# Altium PCB PCB2.PcbDoc
Units mil, origin at the board's own origin, x right, y up, seen from the top; angles counter-clockwise.
Board outline 3316.26 x 1160 mil, 2 copper layers (Top Layer, Bottom Layer); 49 components, 41 nets, 161 pads, 17 vias.
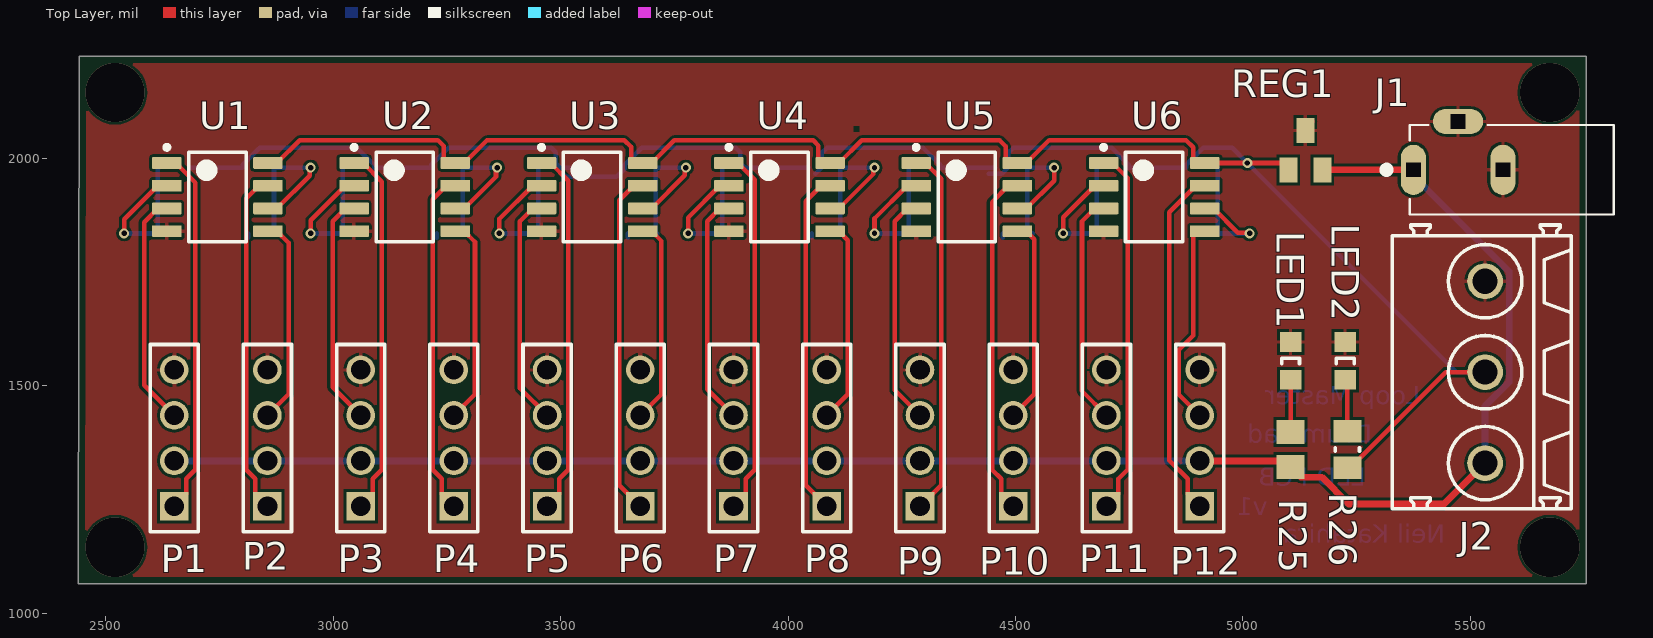
[diagram p0: Top Layer view]
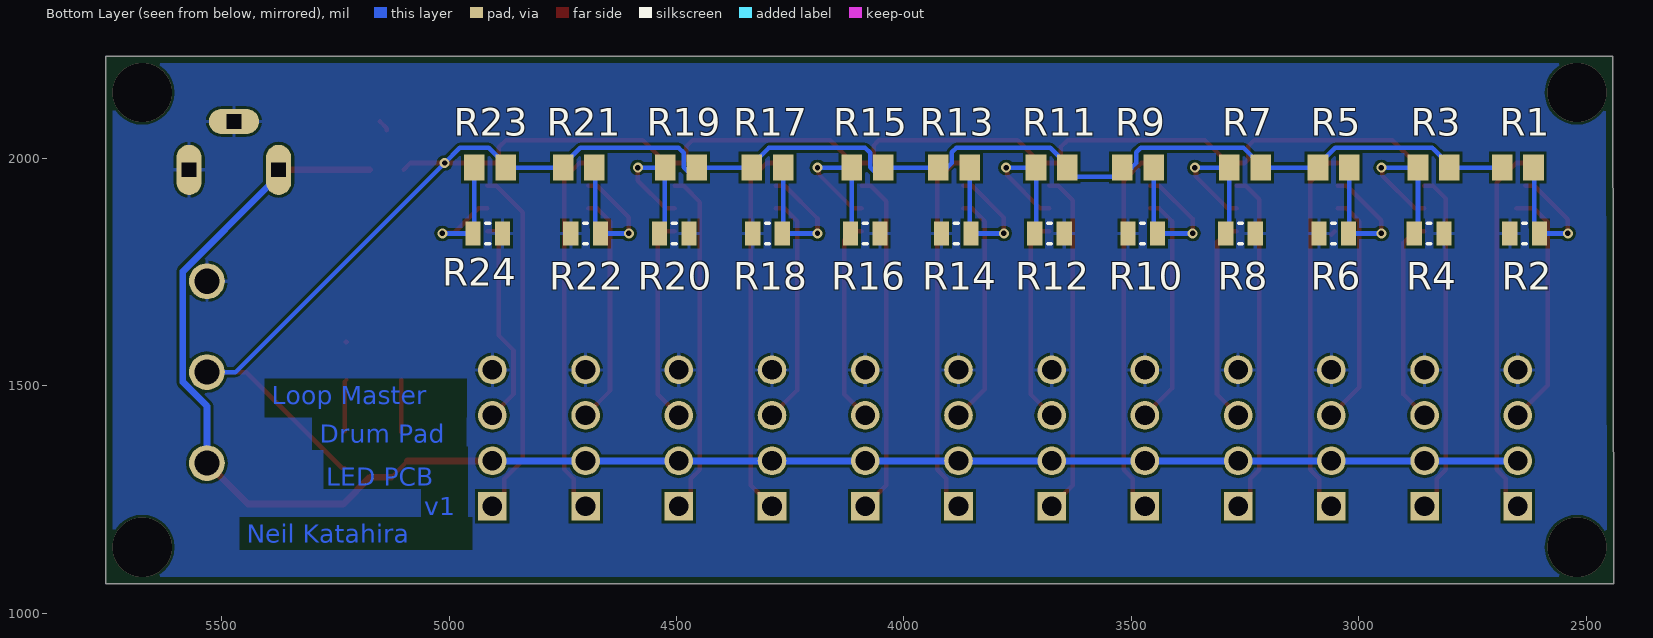
[diagram p1: Bottom Layer view, seen from below]
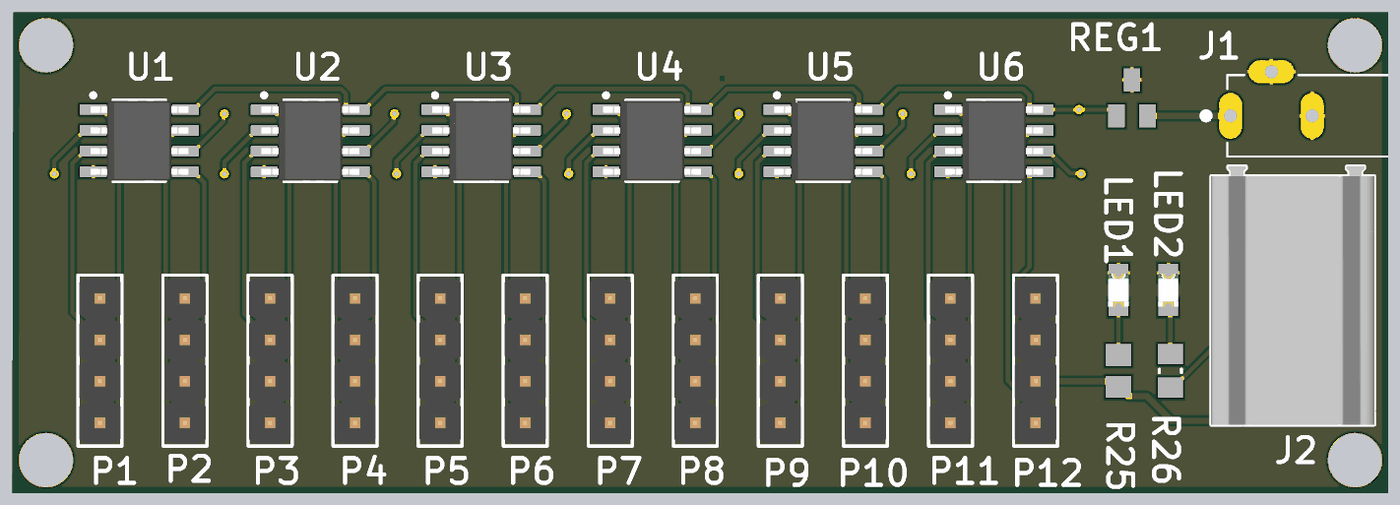
[diagram p2: 3D render of the assembled board from above, using the file's embedded part models]

## Layer stack, top to bottom
Top Solder: solder mask 0.4, Solder Resist, Dk 3.5
Top Layer: signal copper 1.4
Dielectric 1: dielectric 12.6, FR-4, Dk 4.8
Bottom Layer: signal copper 1.4
Bottom Solder: solder mask 0.4, Solder Resist, Dk 3.5

## Board outline
2438.74,1065 5755,1065 5755,2225 2441.24,2225

## Design rules (kind name [scope] priority, off if disabled: settings)
BoardOutlineClearance [All] p1: gap=15 ignorepadtopadclearanceinfootprint=FALSE
Clearance [All] p1: gap=6 ignorepadtopadclearanceinfootprint=FALSE except(0: Arc-Hole Track-Hole SMDPad-Hole THPad-Hole Via-Hole Fill-Hole Poly-Hole Region-Hole Text-Hole)
ComponentClearance [All] p1: gap=1 collisioncheckmode=3 verticalgap=1 showdistances=FALSE
DiffPairsRouting [All] p1: maxlimit=393.7 minlimit=6 mostfreqgap=8 toplayer_minwidth=6 toplayer_maxwidth=15 toplayer_prefwidth=8 bottomlayer_minwidth=6 bottomlayer_maxwidth=15 bottomlayer_prefwidth=8 maxuncoupledlength=500
HoleSize [All] p1: absolutevalues=TRUE maxlimit=265 minlimit=13 maxpercent=80.000 minpercent=20.000
HoleToHoleClearance [All] p1: gap=10 allowstackedmicrovias=FALSE
MinimumAnnularRing [All] p1: minimumring=7
MinimumSolderMaskSliver [All] p1: minsoldermaskwidth=0
PlaneClearance [All] p1: clearance=10
PlaneConnect [All] p1: planeconnectstyle=Direct reliefexpansion=16 reliefentries=4 reliefconductorwidth=6 reliefairgap=6
PolygonConnect [All] p1: connectstyle=Relief reliefconductorwidth=8 reliefentries=4 polygonreliefangle="90 Angle" airgapwidth=6
RoomDefinition Sheet3 [InComponentClass('Sheet3')] p1: confinementstyle=ConfineIn formatcopy=TRUE lockcomponents=FALSE outline 0,0 2000,0 2000,1000 0,1000
RoomDefinition Sheet1 [InComponentClass('Sheet1')] p2: confinementstyle=ConfineIn formatcopy=TRUE lockcomponents=FALSE outline 0,0 2000,0 2000,1000 0,1000
RoutingCorners [All] p1: cornerstyle=45-Degree minsetback=49.21 maxsetback=49.21
RoutingVias [All] p1: holewidth=15 width=30 viastyle="Through Hole" minholewidth=13 minwidth=27 maxholewidth=100 maxwidth=114
SilkToSilkClearance [All] p1: silktosilkclearance=0
SilkToSolderMaskClearance [IsPad] p1: minsilkscreentomaskgap=6 clearancetoexposedcopper=TRUE
SolderMaskExpansion [All] p1: expansion=2.95
Width [All] p1: maxlimit=400 minlimit=6 preferedwidth=8
20 further rules are at their usual default settings.

## Classes and differential pairs
component class Sheet3: R1 R2 R3 R4 R5 R6 R7 R8 R9 R10 R11 R12 R13 R14 R15 R16 R17 R18 R19 R20 R21 R22 R23 R24 U1 U2 U3 U4 U5 U6
component class Sheet1: J2 LED2 R25 R26

## Components (designator, comment, footprint, x,y, rotation, side; value= is the part's Value field where it differs from the comment)
J1 "PJ-007" CUI_PJ-007 5375,1975 r0 top
J2 "1716090000" LM_5_08_90_03 5525,1530 r90 top
LED1 "150080VS75000" 0805_A 5105,1555 r270 top
LED2 "150080RS75000" 0805_A 5225,1555 r270 top
P1 "61300411121" 61300411121 2650,1385 r90 top
P2 "61300411121" 61300411121 2855,1385 r90 top
P3 "61300411121" 61300411121 3060,1385 r90 top
P4 "61300411121" 61300411121 3265,1385 r90 top
P5 "61300411121" 61300411121 3470,1385 r90 top
P6 "61300411121" 61300411121 3675,1385 r90 top
P7 "61300411121" 61300411121 3880,1385 r90 top
P8 "61300411121" 61300411121 4085,1385 r90 top
P9 "61300411121" 61300411121 4290,1385 r90 top
P10 "61300411121" 61300411121 4495,1385 r90 top
P11 "61300411121" 61300411121 4700,1385 r90 top
P12 "61300411121" 61300411121 4905,1385 r90 top
R1 "ERJ-6GEYJ152V" RESC2013X70X40NL20T20 2650,1980 r0 bottom
R2 "CRCW08054K70JNEA" RESC2013X50X30LL20T20 2635,1835 r180 bottom
R3 "ERJ-6GEYJ152V" RESC2013X70X40NL20T20 2835,1980 r180 bottom
R4 "CRCW08054K70JNEA" RESC2013X50X30LL20T20 2845,1835 r0 bottom
R5 "ERJ-6GEYJ152V" RESC2013X70X40NL20T20 3055,1980 r0 bottom
R6 "CRCW08054K70JNEA" RESC2013X50X30LL20T20 3055,1835 r180 bottom
R7 "ERJ-6GEYJ152V" RESC2013X70X40NL20T20 3250,1980 r180 bottom
R8 "CRCW08054K70JNEA" RESC2013X50X30LL20T20 3260,1835 r0 bottom
R9 "ERJ-6GEYJ152V" RESC2013X70X40NL20T20 3485,1980 r0 bottom
R10 "CRCW08054K70JNEA" RESC2013X50X30LL20T20 3475,1835 r180 bottom
R11 "ERJ-6GEYJ152V" RESC2013X70X40NL20T20 3675,1980 r180 bottom
R12 "CRCW08054K70JNEA" RESC2013X50X30LL20T20 3680,1835 r0 bottom
R13 "ERJ-6GEYJ152V" RESC2013X70X40NL20T20 3890,1980 r0 bottom
R14 "CRCW08054K70JNEA" RESC2013X50X30LL20T20 3885,1835 r180 bottom
R15 "ERJ-6GEYJ152V" RESC2013X70X40NL20T20 4080,1980 r180 bottom
R16 "CRCW08054K70JNEA" RESC2013X50X30LL20T20 4085,1835 r0 bottom
R17 "ERJ-6GEYJ152V" RESC2013X70X40NL20T20 4300,1980 r0 bottom
R18 "CRCW08054K70JNEA" RESC2013X50X30LL20T20 4300,1835 r180 bottom
R19 "ERJ-6GEYJ152V" RESC2013X70X40NL20T20 4490,1980 r180 bottom
R20 "CRCW08054K70JNEA" RESC2013X50X30LL20T20 4505,1835 r0 bottom
R21 "ERJ-6GEYJ152V" RESC2013X70X40NL20T20 4715,1980 r0 bottom
R22 "CRCW08054K70JNEA" RESC2013X50X30LL20T20 4700,1835 r180 bottom
R23 "ERJ-6GEYJ152V" RESC2013X70X40NL20T20 4910,1980 r180 bottom
R24 "CRCW08054K70JNEA" RESC2013X50X30LL20T20 4915,1835 r0 bottom
R25 "ERJ-6ENF5110V" RESC2013X70X40ML20T20 5105,1360 r270 top
R26 "CRCW080575R0FKEA" RESC2013X50X30ML20T20 5230,1360 r270 top
REG1 "TLV76012DBZT" SOT23 5137.4,2018.31 r0 top
U1 "TL072CDR" D0008A_M 2745,1915 r0 top
U2 "TL072CDR" D0008A_M 3157,1915 r0 top
U3 "TL072CDR" D0008A_M 3569,1915 r0 top
U4 "TL072CDR" D0008A_M 3981,1915 r0 top
U5 "TL072CDR" D0008A_M 4393,1915 r0 top
U6 "TL072CDR" D0008A_M 4805,1915 r0 top

## Footprints (in the part's own frame and the unit in brackets; to place one, negate y for a bottom-side part, rotate by r counter-clockwise, add the part's x,y. Pads: shape width x height; smd on the part's side, far side on the other; paste and mask are expansions set on the pad)
0805_A [mm] "Chip LED, 2-Leads, Body 2.0x1.3mm, IPC Medium Density"
  rect 1.1x1.2 smd: 1(-1.05,0) 2(1.05,0)
  silkscreen extent -0.15,-0.5 0.15,0.5, body extent -1,-0.62 1,0.63, height 0.68
61300411121 [mm] "Pin Header, pitch 2.54 mm, THT, Vertical, single row, 4p"
  rect 1.6x1.6 hole 1.1: 1(-3.81,0)
  round 1.6 hole 1.1: 2(-1.27,0) 3(1.27,0) 4(3.81,0)
  silkscreen extent -5.23,-1.34 5.23,1.34, body extent -5.08,-1.27 5.08,1.27, height 8.57
CUI_PJ-007 [mm]
  oval 1.4x2.8 hole 0.8 square: 1(0,0) 2(5,0)
  oval 2.8x1.4 hole 0.8 square: 3(2.5,2.7)
  silkscreen extent -1.7,-2.5 11.2,2.5
D0008A_M [mm] "SOIC, 8-Leads, Body 5x4mm, Pitch 1.27mm, IPC Low Density"
  rrect15% 1.65x0.65 smd: 1(-2.825,1.905) 2(-2.825,0.635) 3(-2.825,-0.635) 4(-2.825,-1.905) 5(2.825,-1.905) 6(2.825,-0.635) 7(2.825,0.635) 8(2.825,1.905)
  silkscreen extent -2.95,-2.5 1.6,2.9, body extent -3,-2.45 3,2.45, height 1.63
LM_5_08_90_03 [mm] "OMNIMATE Signal - Serie LM  LM 5.08/03/90 3.5"
  round 2 hole 1.4: A1(-5.08,-0.2) A2(0,-0.2) A3(5.08,-0.2)
  silkscreen extent -7.62,-5 8.22,5, body extent -7.62,-5 8.22,5, height 13.81
RESC2013X50X30LL20T20 [mm] "Chip Resistor, 2-Leads, Body 2.00x1.25mm, IPC High Density"
  rect 0.85x1.35 smd: 1(-0.825,0) 2(0.825,0)
  silkscreen extent -0.1,-0.58 0.1,0.58, body extent -1.1,-0.72 1.1,0.72, height 0.5
RESC2013X50X30ML20T20 [mm] "Chip Resistor, 2-Leads, Body 2.00x1.25mm, IPC Low Density"
  rect 1.25x1.55 smd: 1(-1.025,0) 2(1.025,0)
  silkscreen extent -0.1,-0.67 0.1,0.67, body extent -1.1,-0.72 1.1,0.72, height 0.5
RESC2013X70X40ML20T20 [mm] "Chip Resistor, 2-Leads, Body 2.00x1.25mm, IPC Low Density"
  rect 1.35x1.55 smd: 1(-0.975,0) 2(0.975,0)
  body extent -1.1,-0.72 1.1,0.72, height 0.7
RESC2013X70X40NL20T20 [mm] "Chip Resistor, 2-Leads, Body 2.00x1.25mm, IPC Medium Density"
  rect 1.15x1.45 smd: 1(-0.875,0) 2(0.875,0)
  body extent -1.1,-0.72 1.1,0.72, height 0.7
SOT23 [mm]
  rect 1x1.4 smd: 1(-0.95,-1.1) 2(0.95,-1.1) 3(0,1.1)

## Part data
J1: "1.3 x 4.2 mm, 2.0 A, Horizontal, Through Hole, Dc Power Jack Connector", Package=None, Availability=Unavailable, CUI_purchase_URL=https://www.cuidevices.com/product/interconnect/connectors/dc-power-connectors/jacks/pj-007?utm_source=snapeda.com&utm_medium=referral&utm_campaign=snapedaBOM, MF="CUI Devices", MP=PJ-007, Price=None, SnapEDA_Link=https://www.snapeda.com/parts/PJ-007/CUI%20Devices/view-part/260682/?ref=snap
J2: library part CMP-1559-01768-1, "OMNIMATE Signal - series LM", Colour=Orange, Manufacturer=Weidmueller, Rated_current_use_group_B_UL_1059="15 A", Rated_voltage_for_surge_voltage_class_pollution_degree_II_2="630 V", Rated_voltage_use_group_B_UL_1059="300 V", UL_94_flammability_rating=V-0, ComponentLink1Description="Manufacturer URL", ComponentLink1URL=http://www.weidmueller.com/, ComponentLink2Description="URL Link1", ComponentLink2URL=http://catalog.weidmueller.com/catalog/Start.do?localeId=en&ObjectID=1716090000, Contact_material=Cu-Leg, Contact_surface=tinned, Insulating_material="Wemid (PA)", Mounting_onto_the_PCB="Solder connection", No_of_poles=3, PackageReference=LM_5_08_90_03, Packaging=Box, PartNumber=1716090000, Pitch_inch="0,2 inch", Pitch_mm="5,08 mm", Qty="500 PCS", Revision=V1, Short_text_for_material="LM 5.08/03/90 3.5SN OR BX", Side_termination_characteristic="closed side", Solder_pin_length_mm="3,5 mm", Solid_max_H05_07_V_U="2,5 mm²", Solid_min_H05_07_V_U="0,2 mm²", Wire_cross_section_AWG_max_UL_1059="AWG 14", Wire_cross_section_AWG_min_UL_1059="AWG 24"
LED1: library part CMP-1426-00009-1, "SMD mono-color Chip LED, WL-SMCW, Bright Green", Color="Bright Green", Manufacturer="Wuerth Elektronik", ComponentLink1Description="Manufacturer URL", ComponentLink1URL=http://www.we-online.com, ComponentLink2Description=Datasheet, ComponentLink2URL=http://katalog.we-online.com/led/datasheet/150080VS75000.pdf, PackageReference=0805_A, PartNumber=150080VS75000
LED2: library part CMP-1426-00011-1, "SMD mono-color Chip LED, WL-SMCW, Red", Color=Red, Manufacturer="Wuerth Elektronik", ComponentLink1Description="Manufacturer URL", ComponentLink1URL=http://www.we-online.com, ComponentLink2Description=Datasheet, ComponentLink2URL=http://katalog.we-online.com/led/datasheet/150080RS75000.pdf, PackageReference=0805_A, PartNumber=150080RS75000
P1 P2 P3 P4 P5 P6 P7 P8 P9 P10 P11 P12: library part CMP-1502-01064-1, "THT Vertical Pin Header WR-PHD, Pitch 2.54 mm, Single Row, 4 pins", Contact Resistance=20mOhm, Manufacturer="Wurth Elektronik", Operating Temperature=-40to105degC, Rated Current=3A, Withstanding Voltage=500VAC, Working Voltage=250VAC, Datasheet URL=https://katalog.we-online.de/em/datasheet/6130xx11121.pdf, Gender=Male, Manufacturer URL=http://www.we-online.de, Mounting Technology=THT, Orientation=Vertical, Package Reference=61300411121, Packaging=Bag, Part Number=61300411121, Pin Number=4, Pitch=2.54mm, Publisher=WurthElektronik, Row Number=Single
R1 R3 R5 R7 R9 R11 R13 R15 R17 R19 R21 R23: library part CMP-2001-00355-1, Manufacturer=Panasonic, Part Number=ERJ-6GEYJ152V
R2 R4 R6 R8 R10 R12 R14 R16 R18 R20 R22 R24: library part CMP-2001-03967-1, Manufacturer="Vishay Dale", Part Number=CRCW08054K70JNEA
R25: library part CMP-2001-00217-1, Manufacturer=Panasonic, Part Number=ERJ-6ENF5110V
R26: library part CMP-2001-04108-1, Manufacturer="Vishay Dale", Part Number=CRCW080575R0FKEA
REG1: "Linear Voltage Regulator IC 1 Output 100mA SOT-23-3", Package="SOT-23-3 Texas Instruments", Availability=Unavailable, MF="Texas Instruments", MP=TLV76012DBZT, Price=None, SnapEDA_Link=https://www.snapeda.com/parts/TLV76012DBZT/Texas%20Instruments/view-part/2782786/?ref=snap
U1 U2 U3 U4 U5 U6: library part CMP-0017-00628-2, "Dual Low-Noise JFET-Input General-Purpose Operational Amplifier, 7 to 36 V, 0 to 70 degC, 8-pin SOIC (D8), Green (RoHS & no Sb/Br)", Manufacturer="Texas Instruments", Rating=Catalog, Total Supply Voltage(Max)(+5V is 5, +/-5V is 10)=36, Total Supply Voltage(Min)(+5V is 5, +/-5V is 10)=7, CMRR(Min)(dB)=70, Code_JEDEC=MS-012, ComponentLink1Description="Manufacturer URL", ComponentLink1URL=http://www.ti.com/, ComponentLink2Description=Datasheet, ComponentLink2URL=http://www.ti.com/lit/ds/symlink/tl072.pdf, ComponentLink3Description="Package Specification", ComponentLink3URL=http://www.ti.com/litv/pdf/msoi002j, DatasheetVersion=SLOS080J, Eco-Plan="Green (RoHS & no Sb/Br)", GBW(Typ)(MHz)=3, IIB(Max)(pA)=200, Iq per channel(Max)(mA)=2.5, Mounting Technology="Surface Mount", Number of Channels=2, Offset Drift(Typ)(uV/C)=18, PackageDescription="8-Pin Plastic Small Outline, Body 4.9 x 3.9 mm, Pitch 1.27 mm", PackageReference=D0008A, PackageVersion="4040047-3/M, 06/2011", PartNumber=TL072CDR, Slew Rate(Typ)(V/us)=13, Sub Family="General Purpose Amplifier, High Supply Voltage Amplifier (>=30V)", Vio (25C)(Max)(mV)=10, Vn at 1kHz(Typ)(nV/rtHz)=18

## Via types
v1: diameter 22, hole 12, Top Layer to Bottom Layer, 13 vias
v2: diameter 130, hole 130, Top Layer to Bottom Layer, 4 vias

## Nets (pads, with @x,y where several pads share a name; then routed paths per layer and width w, separated by ;. In a path a pad name is that pad's centre, name@x,y a point inside that pad or via, vN(x,y) a via of type N, cw(c..) or ccw(c..) an arc to the next point about the centre after c; other vN are vias at no path point)
3V3: J2.A2 R1.2 R3.2 R5.2 R7.2 R9.2 R11.2 R13.2 R15.2 R17.2 R19.2 R21.2 R23.2 R26.2 REG1.1 U1.8 U2.8 U3.8 U4.8 U5.8 U6.8 | length 6309.1
  Top Layer w8: R26.2 R26.2@5235.91,1319.65
  Top Layer w10: U1.8 2875.91,1990 2925.91,2040 3230,2040 3242.66,2027.34 3242.66,1997.8 3250.45,1990 U2.8 3287.91,1990 3337.91,2040 3640,2040 3654.66,2025.34 3654.66,1997.8 3662.45,1990 U3.8 3699.91,1990 3749.91,2040 4055,2040 4066.66,2028.34 4066.66,1997.8 4074.45,1990 U4.8 4111.9,1990 4161.9,2040 4465,2040 4478.66,2026.34 4478.66,1997.8 4486.45,1990 U5.8 4523.9,1990 4573.9,2040 4875,2040 4890.66,2024.34 4890.66,1997.8 4898.45,1990 U6.8 v1(5010,1990) 5085.31,1990 5100,1975.31 REG1.1 ; R26.2@5235.91,1319.65 5446.26,1530 J2.A2
  Bottom Layer w10: R1.2 R3.2 2800.55,1985.91 2834.65,2020 2835,2020 2838.54,2023.54 3051.81,2023.54 3089.45,1985.91 R5.2 R7.2 3215.55,1985.91 3253.19,2023.54 3479.4,2023.54 3489.43,2013.52 3489.43,1990.02 3499.45,1980 R9.2 ; R9.2@3505.31,1965.86 3511.16,1960 3622.91,1960 3640.55,1977.64 R11.2 3640.55,1985.91 3678.19,2023.54 3884.4,2023.54 3894.43,2013.52 3894.43,1990.02 3904.45,1980 R13.2 R15.2 ; R15.2@4059.69,1965.86 4074.39,1980.56 4074.39,2012.34 4085.6,2023.54 4296.81,2023.54 4334.45,1985.91 R17.2 R19.2 ; R19.2@4441.41,1965.86 4469.69,1965.86 4484.39,1980.56 4484.39,2012.34 4495.6,2023.54 4711.81,2023.54 4749.45,1985.91 R21.2 R23.2 4875.55,1985.91 4913.19,2023.54 4976.46,2023.54 v1(5010,1990) 5470,1530 J2.A2
+12: J1.1 J2.A1 P1.2 P2.2 P3.2 P4.2 P5.2 P6.2 P7.2 P8.2 P9.2 P10.2 P11.2 P12.2 R25.2 REG1.2 | length 3917.5
  Top Layer w8: R25.2@5091.61,1335 R25.2 R25.2@5127.57,1299.04
  Top Layer w10: P12.2 P12.2@4905.75,1334.25
  Top Layer w15: P12.2 R25.2@5091.61,1335 ; R25.2@5127.57,1299.04 5173.74,1299.04 5232.78,1240 5442.87,1240 J2.A1 ; REG1.2 J1.1
  Bottom Layer w15: P1.2 P2.2 P3.2 P4.2 P5.2 P6.2 P7.2 P8.2 P9.2 P10.2 P11.2 P12.2 ; J1.1 5375,1958.3 5393.53,1939.76 5397.88,1939.76 5585.74,1751.9 5585.74,1508.1 5532.87,1455.23 J2.A1
GND: J1.2 J1.3 J2.A3 LED1.1 LED2.1 P1.4 P2.4 P3.4 P4.4 P5.4 P6.4 P7.4 P8.4 P9.4 P10.4 P11.4 P12.4 R2.1 R4.1 R6.1 R8.1 R10.1 R12.1 R14.1 R16.1 R18.1 R20.1 R22.1 R24.1 REG1.3 U1.4 U2.4 U3.4 U4.4 U5.4 U6.4 | length 258.7
  Top Layer w10: U2.4@3052.2,1840 U2.4@3060,1832.2 ; REG1.3 5137.4,2066.61 REG1.3@5152.09,2081.3 ; LED2.1 LED2.1@5226.97,1596.34 ; J1.3 J1.3@5497.05,2081.3 ; J1.2@5571.85,1947.44 J1.2 J1.2@5571.85,2006.5
  Bottom Layer w10: R4.1@2812.52,1825.16 R4.1 ; R8.1@3227.52,1825.16 R8.1 ; R12.1@3647.52,1825.16 R12.1 ; R16.1@4052.52,1825.16 R16.1 ; P9.4 P9.4@4293.81,1531.19 ; R20.1@4472.52,1825.16 R20.1 ; J1.3 J1.3@5497.05,2081.3 ; J1.2@5571.85,1947.44 J1.2 J1.2@5571.85,2006.5
LEDIN_1: P1.3 U1.3 | length 534.4
  Top Layer w10: P1.3 2583.78,1501.22 2583.78,1859.68 2614.09,1890 U1.3 U1.3@2653.47,1890
LEDIN_2: P2.3 U1.5 | length 454.5
  Top Layer w10: P2.3 2901.5,1481.5 2901.5,1814.41 2875.91,1840 U1.5
LEDIN_3: P3.3 U2.3 | length 511.8
  Top Layer w10: U2.3 3026.09,1890 2998.3,1862.2 2998.3,1496.7 P3.3
LEDIN_4: P4.3 U2.5 | length 453.7
  Top Layer w10: P4.3 3311.5,1481.5 3311.5,1816.41 3287.91,1840 U2.5
LEDIN_5: P5.3 U3.3 | length 510.9
  Top Layer w10: U3.3 3438.09,1890 3410.3,1862.2 3410.3,1494.7 P5.3
LEDIN_6: P6.3 U3.5 | length 452.9
  Top Layer w10: P6.3 3721.5,1481.5 3721.5,1818.41 3699.91,1840 U3.5
LEDIN_7: P7.3 U4.3 | length 510.1
  Top Layer w10: U4.3 3850.09,1890 3822.3,1862.2 3822.3,1492.7 P7.3
LEDIN_8: P8.3 U4.5 | length 452.1
  Top Layer w10: P8.3 4131.5,1481.5 4131.5,1820.41 4111.9,1840 U4.5
LEDIN_9: P9.3 U5.3 | length 509.3
  Top Layer w10: U5.3 4262.1,1890 4234.3,1862.2 4234.3,1490.7 P9.3
LEDIN_10: P10.3 U5.5 | length 451.2
  Top Layer w10: P10.3 4541.5,1481.5 4541.5,1822.41 4523.9,1840 U5.5
LEDIN_11: P11.3 U6.3 | length 508.4
  Top Layer w10: U6.3 4674.1,1890 4646.3,1862.2 4646.3,1488.7 P11.3
LEDIN_12: P12.3 U6.5 | length 458.6
  Top Layer w10: P12.3 4858.5,1481.5 4858.5,1578.5 4890.66,1610.66 4890.66,1832.2 4898.45,1840 U6.5
LEDOUT_1: P1.1 U1.1 | length 811.8
  Top Layer w10: U1.1 2653.47,1990 2696.5,1946.97 2696.5,1315.74 2676.5,1295.74 2676.5,1261.5 P1.1
LEDOUT_2: P2.1 U1.7 | length 755.6
  Top Layer w10: P2.1 2828.5,1261.5 2828.5,1295.74 2808.5,1315.74 2808.5,1911.97 2836.53,1940 U1.7
LEDOUT_3: P3.1 U2.1 | length 810.9
  Top Layer w10: U2.1 3065.47,1990 3106.5,1948.97 3106.5,1315.74 3086.5,1295.74 3086.5,1261.5 P3.1
LEDOUT_4: P4.1 U2.7 | length 756.4
  Top Layer w10: P4.1 3238.5,1261.5 3238.5,1295.74 3218.5,1315.74 3218.5,1909.97 3248.53,1940 U2.7
LEDOUT_5: P5.1 U3.1 | length 810.1
  Top Layer w10: U3.1 3477.47,1990 3516.5,1950.97 3516.5,1315.74 3496.5,1295.74 3496.5,1261.5 P5.1
LEDOUT_6: P6.1 U3.7 | length 757.2
  Top Layer w10: P6.1 3628.5,1281.5 3628.5,1907.97 3660.53,1940 U3.7
LEDOUT_7: P7.1 U4.1 | length 809.3
  Top Layer w10: U4.1 3889.47,1990 3926.5,1952.97 3926.5,1315.74 3906.5,1295.74 3906.5,1261.5 P7.1
LEDOUT_8: P8.1 U4.7 | length 758
  Top Layer w10: P8.1 4038.5,1281.5 4038.5,1905.97 4072.53,1940 U4.7
LEDOUT_9: P9.1 U5.1 | length 808.5
  Top Layer w10: U5.1 4301.47,1990 4336.5,1954.97 4336.5,1281.5 P9.1
LEDOUT_10: P10.1 U5.7 | length 758.9
  Top Layer w10: P10.1 4468.5,1261.5 4468.5,1295.74 4448.5,1315.74 4448.5,1903.97 4484.53,1940 U5.7
LEDOUT_11: P11.1 U6.1 | length 807.6
  Top Layer w10: U6.1 4713.47,1990 4746.5,1956.97 4746.5,1315.74 4726.5,1295.74 4726.5,1261.5 P11.1
LEDOUT_12: P12.1 U6.7 | length 776.3
  Top Layer w10: P12.1 4878.5,1261.5 4878.5,1295.74 4838.5,1335.74 4838.5,1881.97 4896.53,1940 U6.7
NetLED1_2: LED1.2 R25.1 | length 115.3
  Top Layer w10: R25.1 LED1.2
NetLED2_2: LED2.2 R26.1 | length 115.4
  Top Layer w8: LED2.2 LED2.2@5230,1508.66
  Top Layer w10: R26.1 LED2.2@5230,1508.66
NetR1_1: R1.1 R2.2 U1.2 | length 368.3
  Top Layer w10: v1(2540,1835) 2540,1865.9 2614.09,1940 U1.2
  Bottom Layer w10: v1(2540,1835) R2.2 2614.25,1846.73 2614.25,1978.7 R1.1
NetR3_1: R3.1 R4.2 U1.6 | length 369.3
  Top Layer w10: U1.6 2875.91,1890 2947.7,1961.8 2947.7,1977.7 v1(2950,1980)
  Bottom Layer w10: R4.2 2869.45,1843.03 R3.1 v1(2950,1980)
NetR5_1: R5.1 R6.2 U2.2 | length 370.6
  Top Layer w10: v1(2950,1835) 2950,1863.9 3026.09,1940 U2.2
  Bottom Layer w10: v1(2950,1835) 3018.58,1835 3020.55,1836.97 R5.1
NetR7_1: R7.1 R8.2 U2.6 | length 363.4
  Top Layer w10: U2.6 3287.91,1890 3357.7,1959.8 3357.7,1977.7 v1(3360,1980)
  Bottom Layer w10: R8.2 3284.45,1843.03 R7.1 v1(3360,1980)
NetR9_1: R9.1 R10.2 U3.2 | length 380.8
  Top Layer w10: v1(3365,1835) 3365,1866.9 3438.09,1940 U3.2
  Bottom Layer w10: v1(3365,1835) R10.2 3450.55,1843.03 R9.1
NetR11_1: R11.1 R12.2 U3.6 | length 352.6
  Top Layer w10: U3.6 3699.91,1890 3772.7,1962.8 3772.7,1977.7 v1(3775,1980)
  Bottom Layer w10: R12.2 3709.45,1838.03 R11.1 v1(3775,1980)
NetR13_1: R13.1 R14.2 U4.2 | length 372.5
  Top Layer w10: v1(3780,1835) 3780,1869.9 3850.09,1940 U4.2
  Bottom Layer w10: v1(3780,1835) R14.2 3855.55,1838.03 R13.1
NetR15_1: R15.1 R16.2 U4.6 | length 363.8
  Top Layer w10: U4.6 4111.9,1890 4187.7,1965.8 4187.7,1977.7 v1(4190,1980)
  Bottom Layer w10: R16.2 4114.45,1838.03 R15.1 v1(4190,1980)
NetR17_1: R17.1 R18.2 U5.2 | length 377.9
  Top Layer w10: v1(4190,1835) 4190,1867.9 4262.1,1940 U5.2
  Bottom Layer w10: v1(4190,1835) R18.2 4265.55,1836.97 R17.1
NetR19_1: R19.1 R20.2 U5.6 | length 345.9
  Top Layer w10: U5.6 4523.9,1890 4585,1951.1 v1(4585,1980)
  Bottom Layer w10: R20.2 4525.75,1846.73 4525.75,1978.7 R19.1 v1(4585,1980)
NetR21_1: R21.1 R22.2 U6.2 | length 366.2
  Top Layer w10: v1(4605,1835) 4605,1870.9 4674.1,1940 U6.2
  Bottom Layer w10: v1(4605,1835) R22.2 4679.25,1846.73 4679.25,1978.7 R21.1
NetR23_1: R23.1 R24.2 U6.6 | length 335.3
  Top Layer w10: U6.6 4935.9,1890 4989,1836.9 5013.1,1836.9 v1(5015,1835)
  Bottom Layer w10: R23.1 4944.45,1838.03 R24.2 v1(5015,1835)
copper on no net:
  other v2: 2520,1145 5675,1145 2520,2145 5675,2145

## Polygon pours and split planes (outlines as drawn)
GND on Top Layer "Top Layer-GND" (solid, pour order 12): 2442.5,2225 5755,2225 5755,1065 2437.5,1065
GND on Bottom Layer "Bottom Layer-GND" (solid, pour order 14): 2442.5,2225 5755,2225 5755,1065 2437.5,1065

## Other copper
Top Layer:
Bottom Layer:
  text "Loop Master" at 5390,1460 h40
  text "Drum Pad" at 5285,1375 h40
  text "LED PCB" at 5270,1280 h40
  text "v1" at 5055,1215 h40
  text "Neil Katahira" at 5445,1155 h40

## Silkscreen, mask and mechanical layers (free items; w line width, h text height)
Mechanical 2:
  circle w3: c5675,1145 r65.19
  circle w3: c5675,2145 r65.19
  circle w3: c2520,2145 r65.19
  circle w3: c2520,1145 r65.19
  lines w3: 2440,1065 2440,2225 5755,2225 5755,1065 2440,1065